# Altium PCB robot-basketball-basket-counter.PcbDoc
Units mm, origin at the board's own origin, x right, y up, seen from the top; angles counter-clockwise.
Board outline 50 x 66 mm, 4 copper layers (Top Layer, GND1, GND2, Bottom Layer), stack 1.588 mm thick; 19 components, 15 nets, 70 pads, 101 vias.
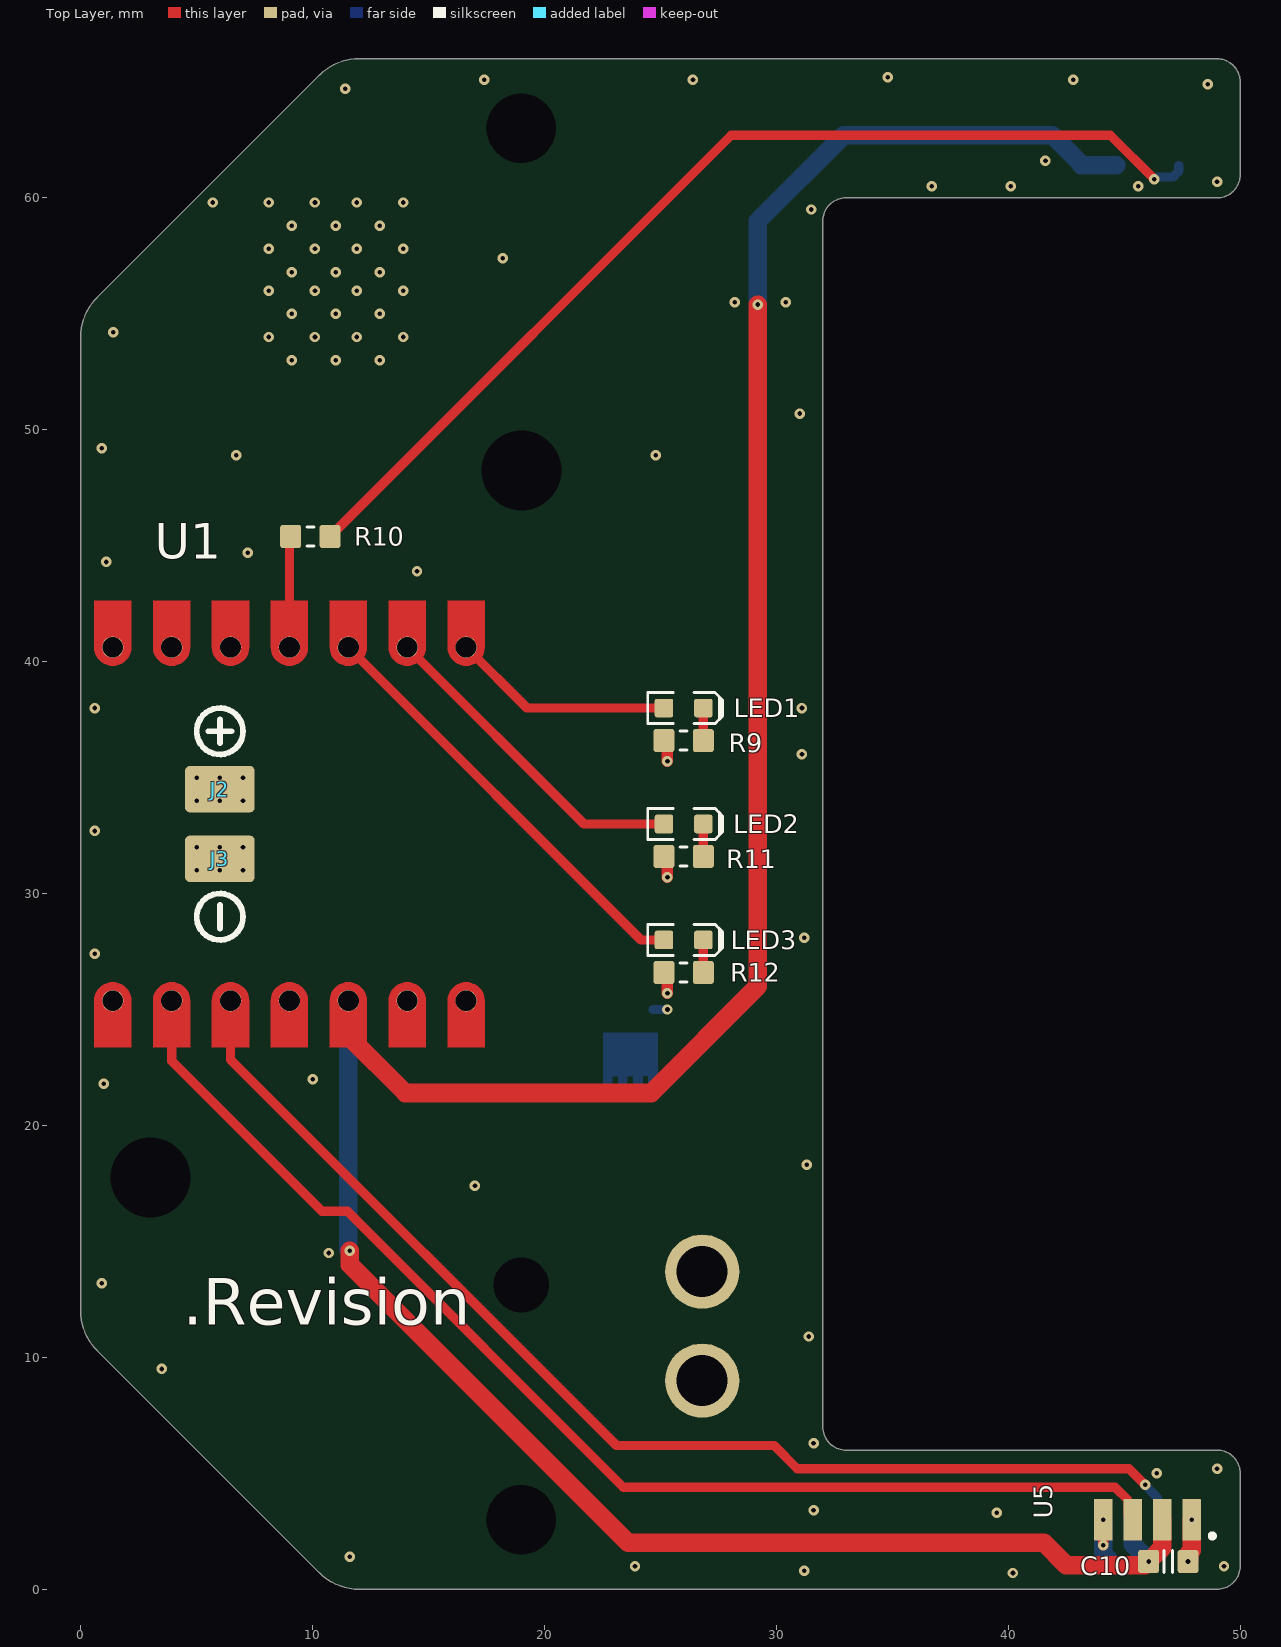
[diagram p0: Top Layer view]
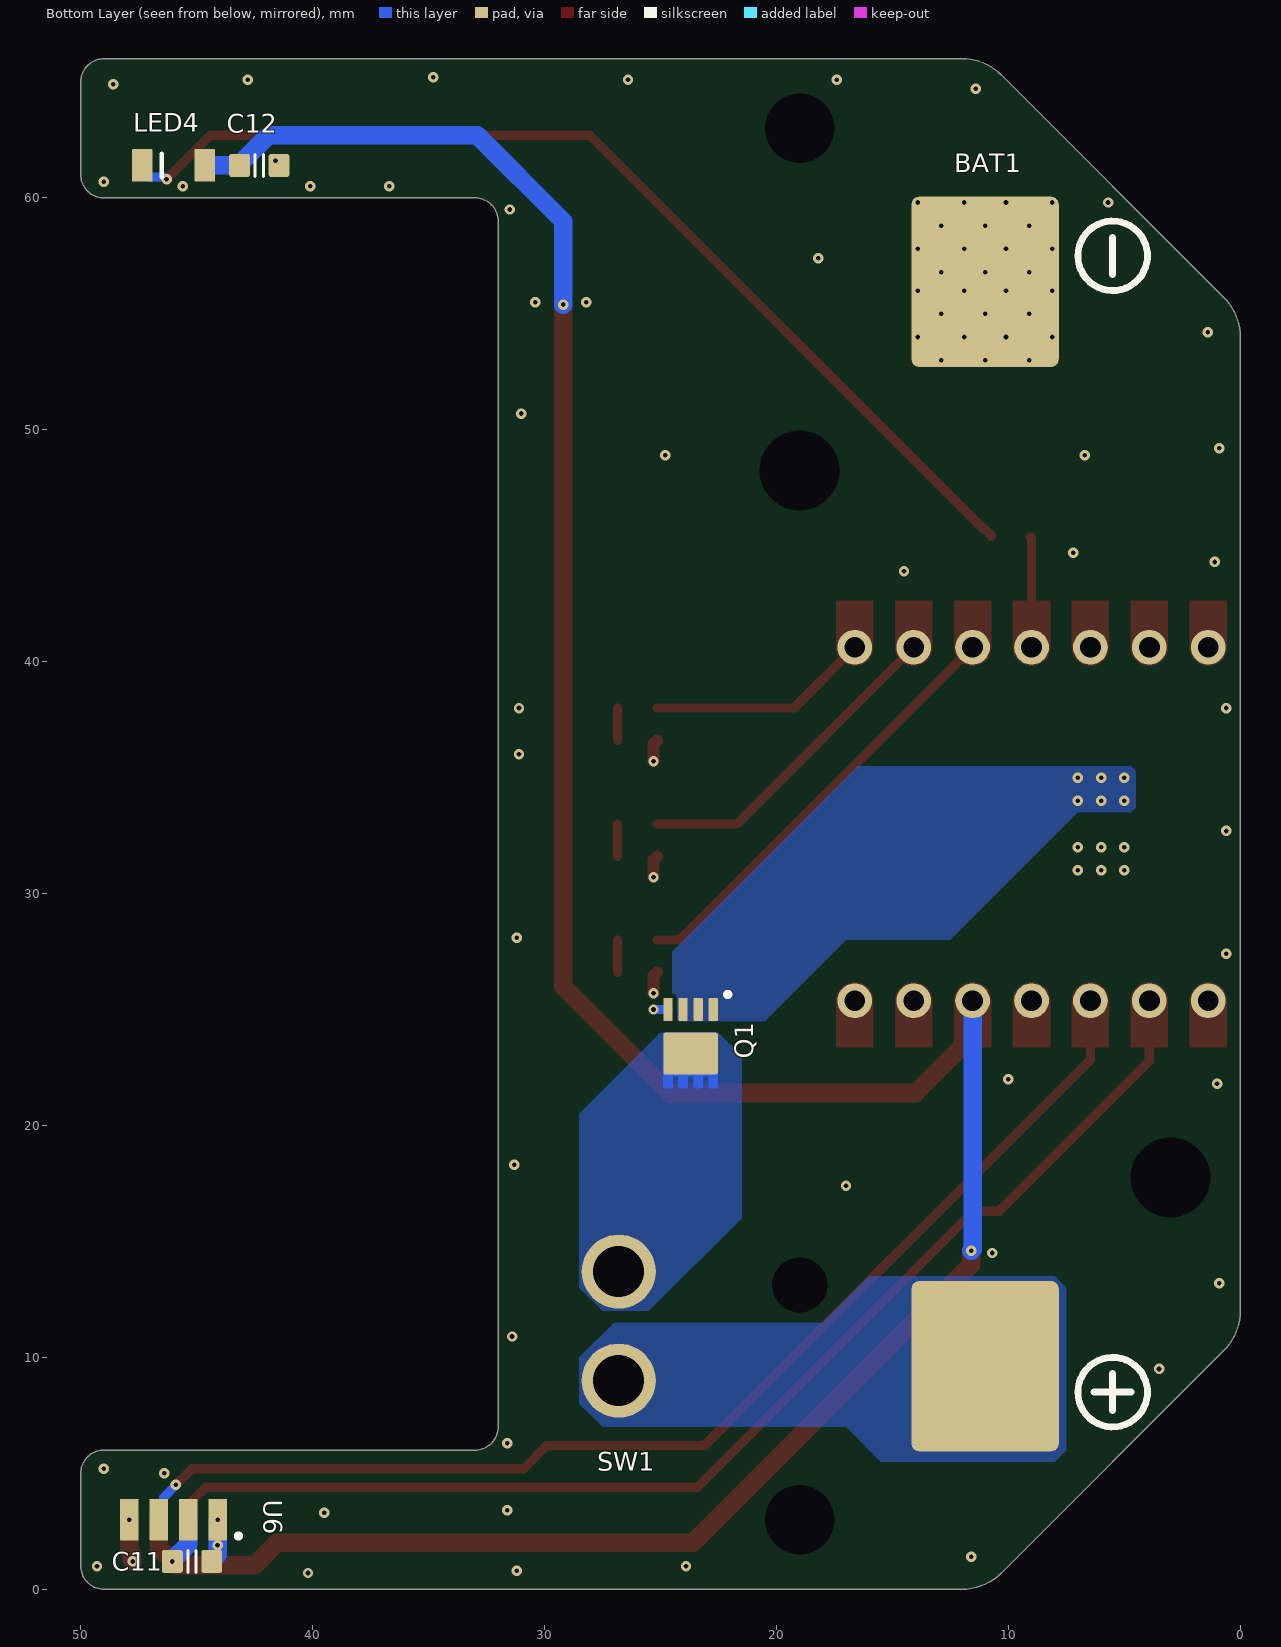
[diagram p1: Bottom Layer view, seen from below]
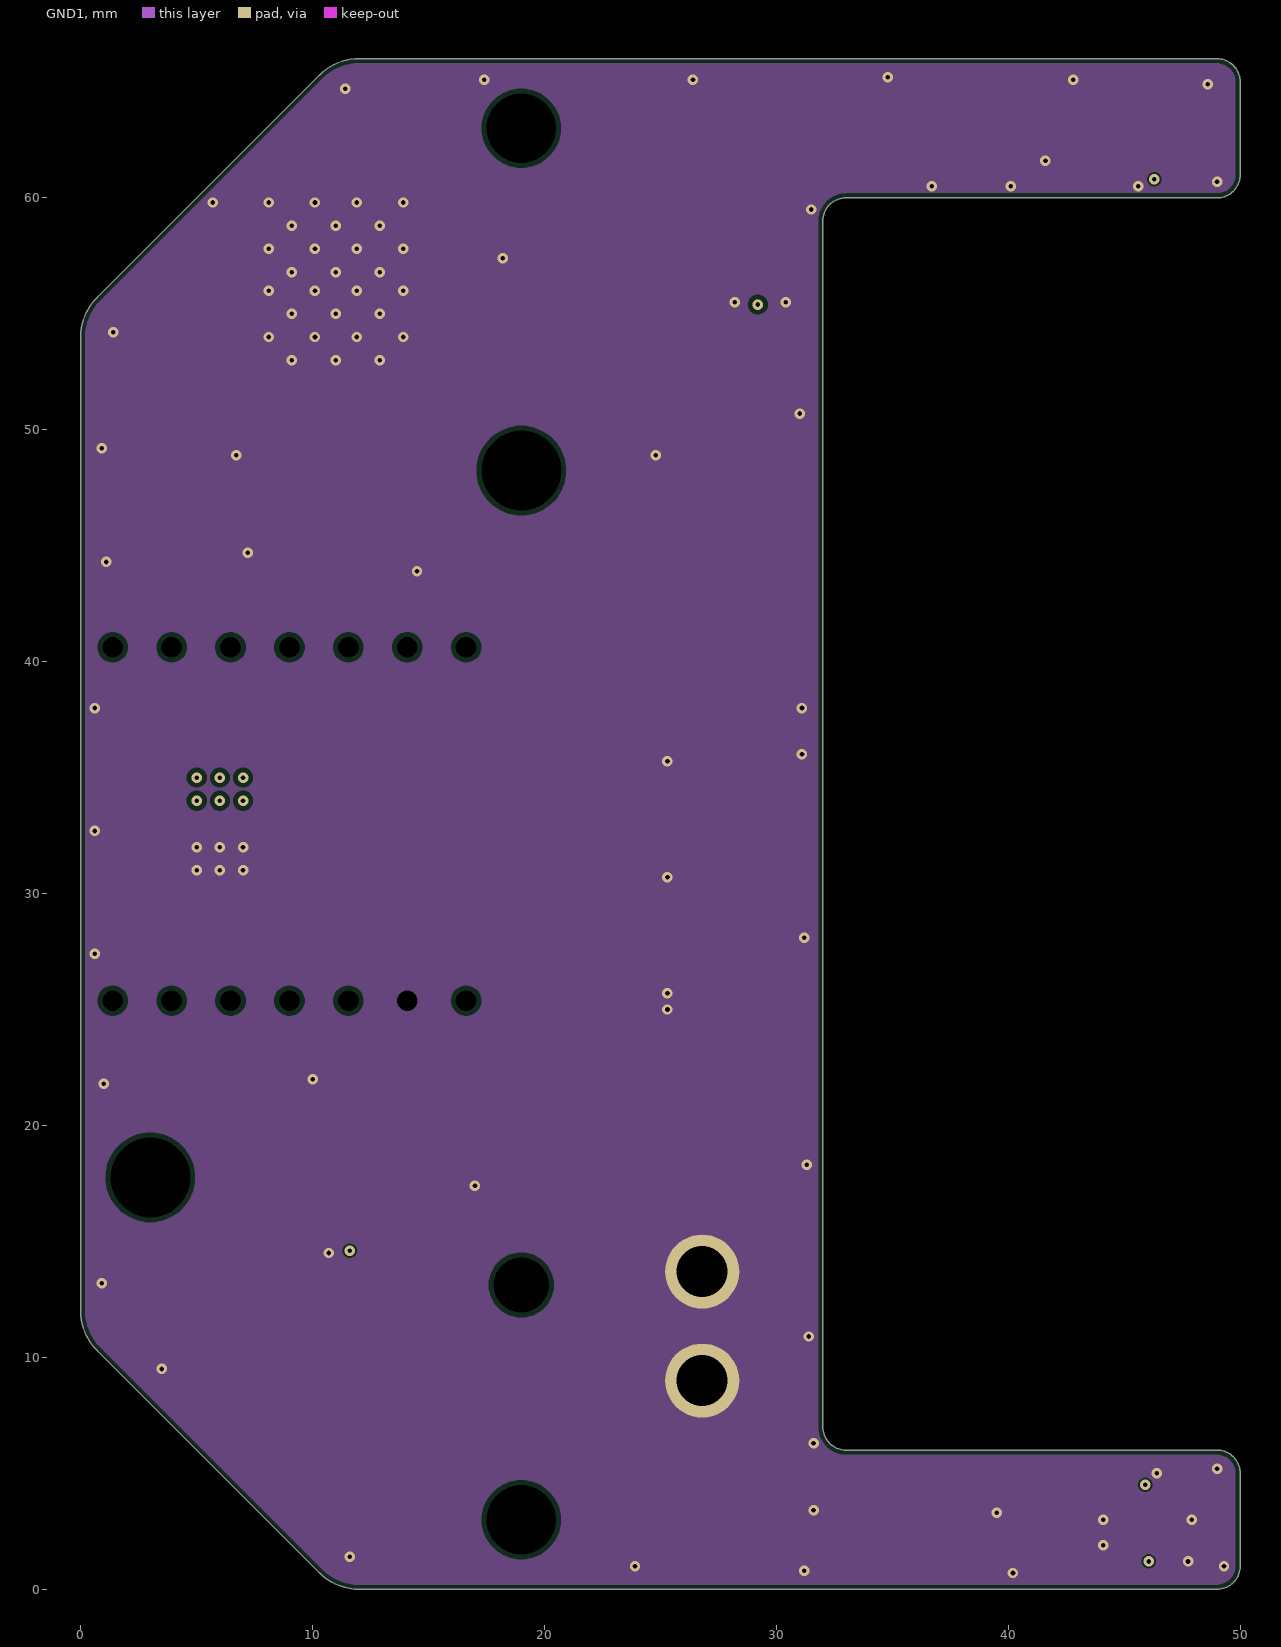
[diagram p2: GND1]
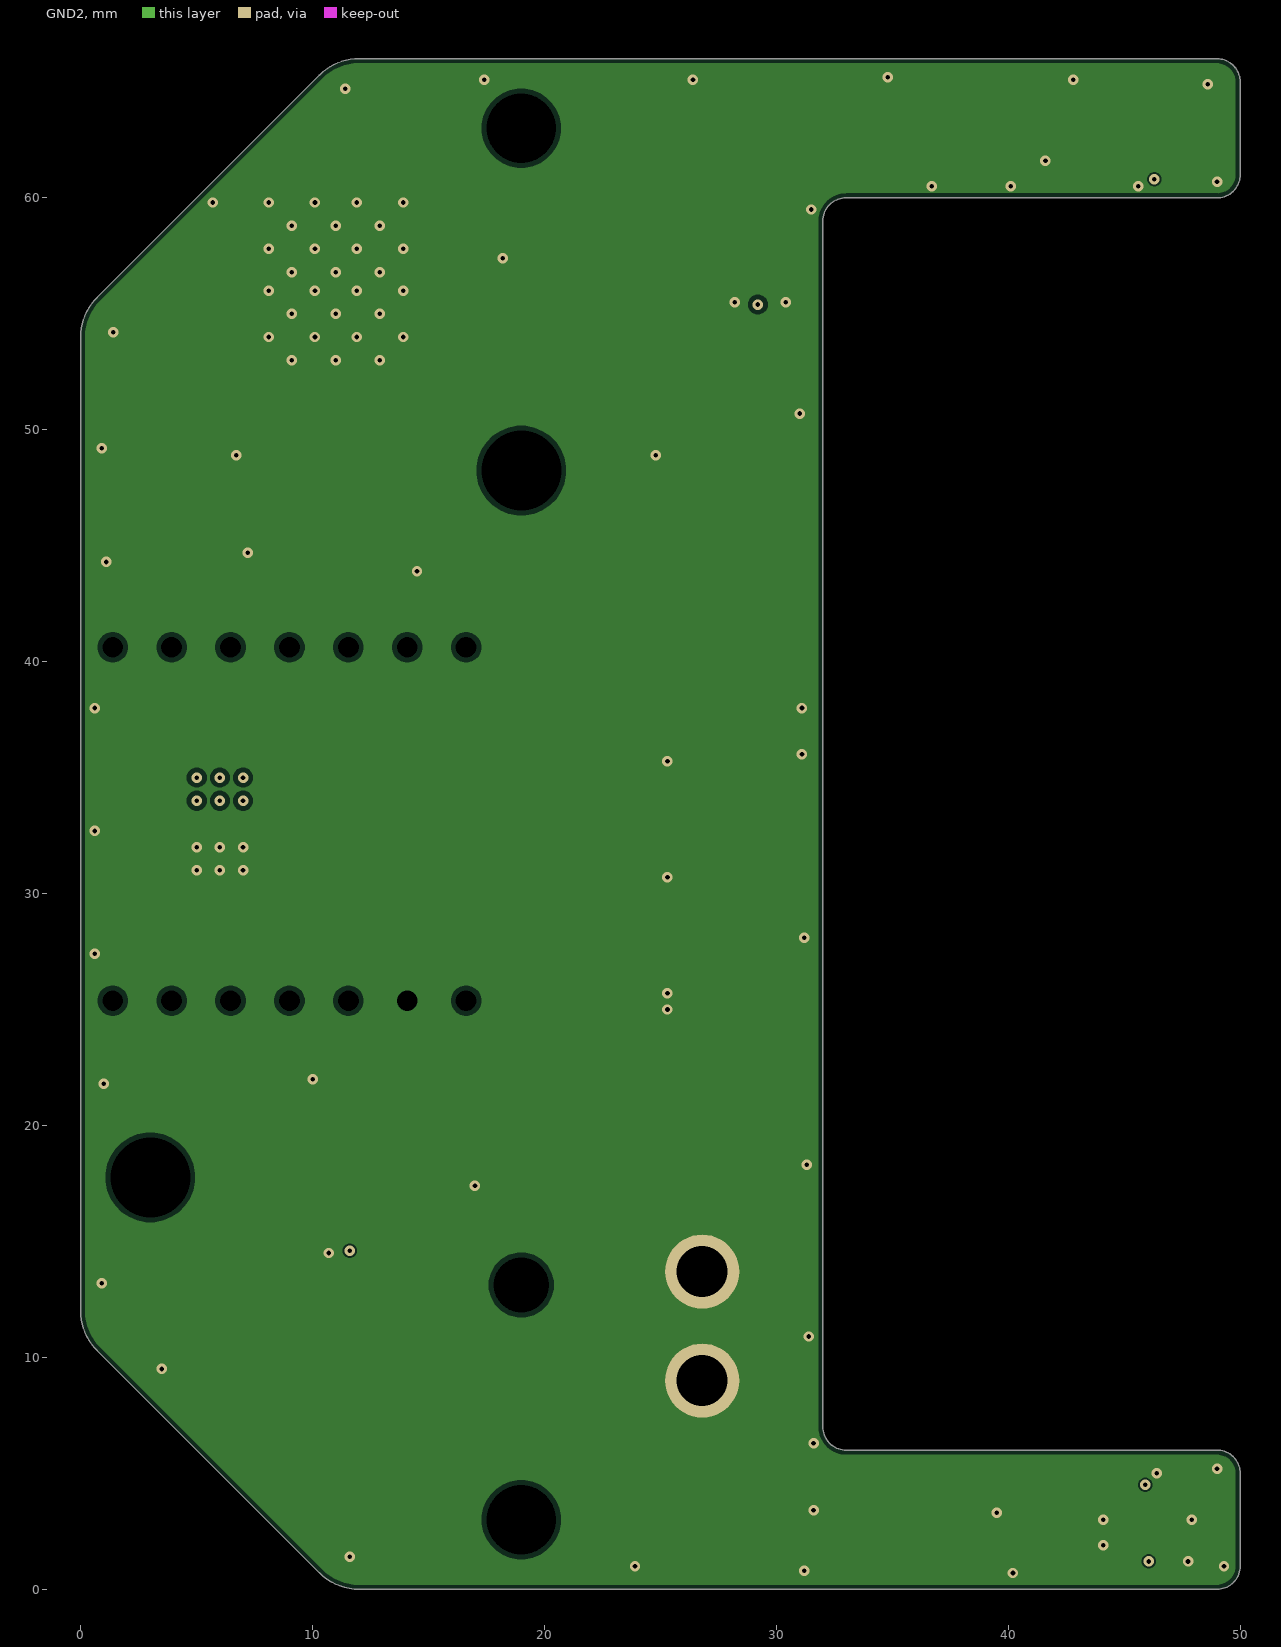
[diagram p3: GND2]
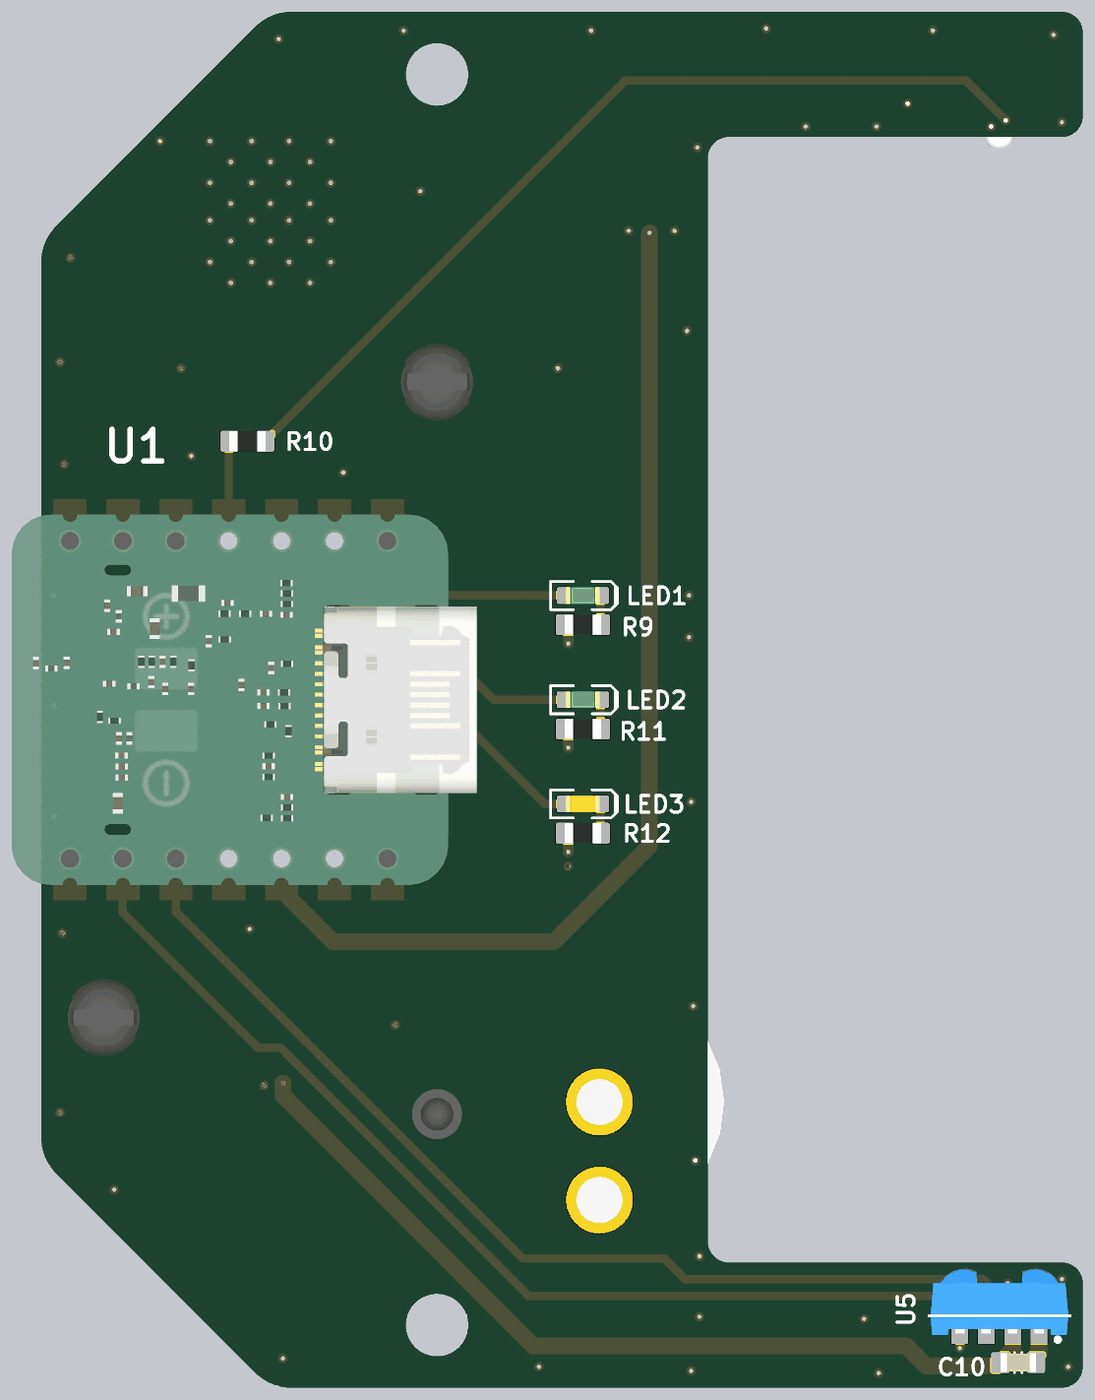
[diagram p4: 3D render of the assembled board from above, using the file's embedded part models]
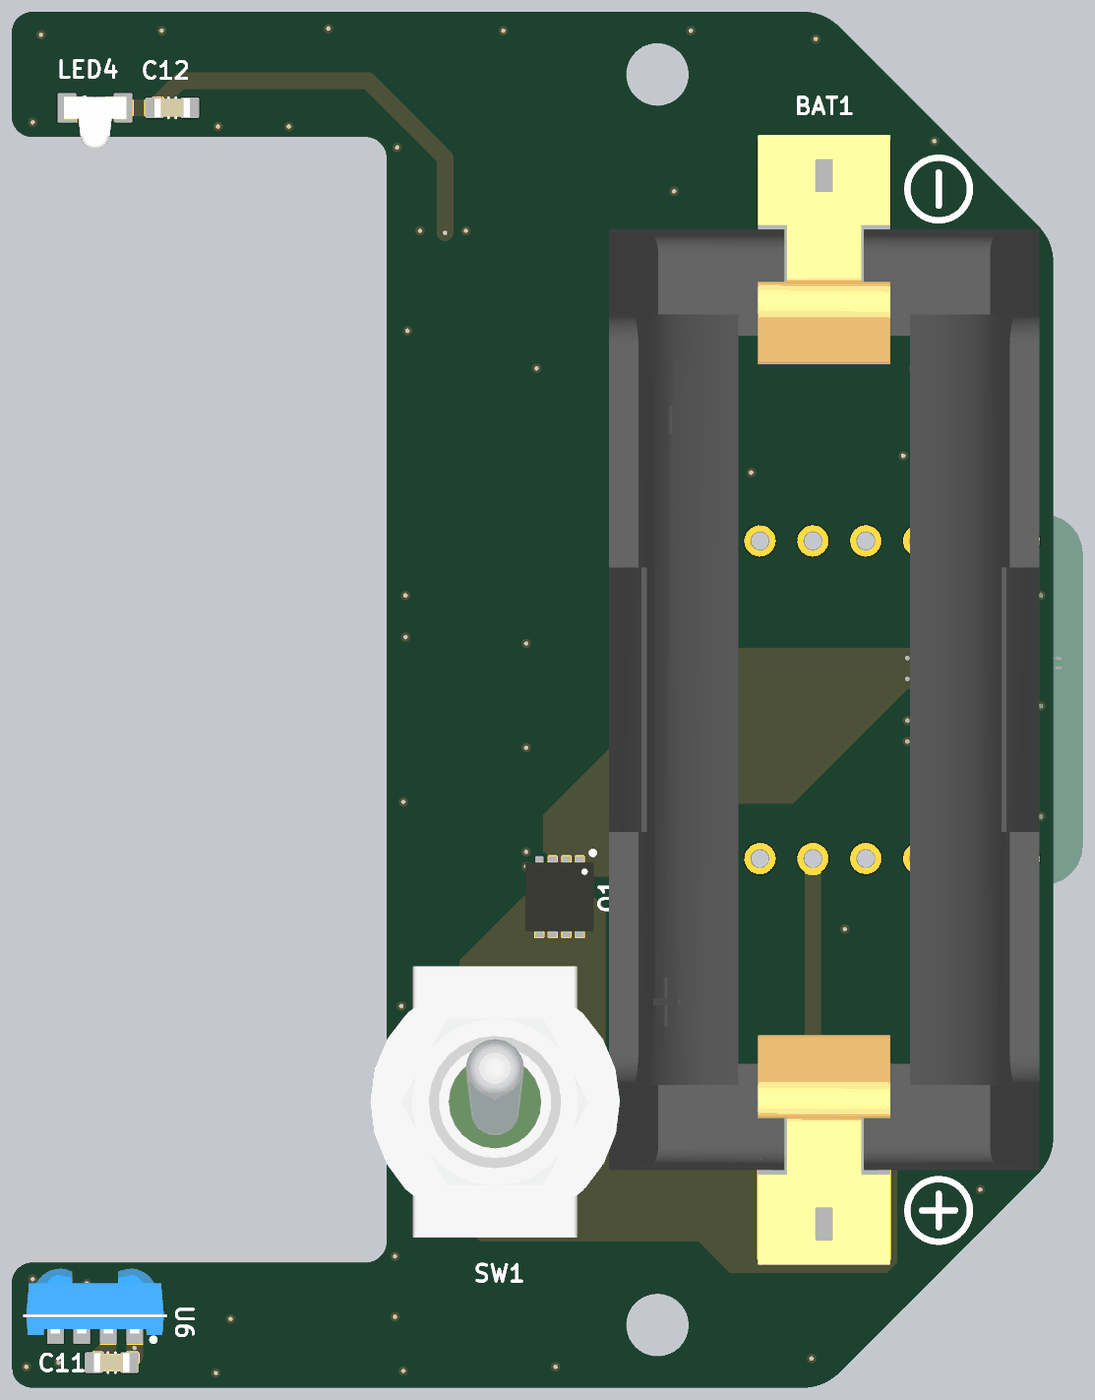
[diagram p5: 3D render of the assembled board from below, using the file's embedded part models]

## Layer stack, top to bottom
Top Solder: solder mask 0.0102, Solder Resist, Dk 3.5
Top Layer: signal copper 0.035
Dielectric 2: prepreg 0.2083, PP-022, Dk 4.5
GND1: signal copper 0.018
Dielectric 1: core 1.065, Core-042, Dk 4.6
GND2: signal copper 0.018
Dielectric 3: prepreg 0.2083, PP-022, Dk 4.5
Bottom Layer: signal copper 0.035
Bottom Solder: solder mask 0.0102, Solder Resist, Dk 3.5

## Board outline
12,0 49,0 ccw(c49,1) 50,1 50,5 ccw(c49,5) 49,6 33,6 cw(c33,7) 32,7 32,59 cw(c33,59) 33,60 49,60 ccw(c49,61) 50,61 50,65 ccw(c49,65) 49,66 12,66 ccw(c12,63.587) 10.293,65.293 0.707,55.707 ccw(c2.413,54.001) 0,54.001 0,12 ccw(c2.414,12) 0.707,10.293 10.293,0.707 ccw(c12,2.414)

## Design rules (kind name [scope] priority, off if disabled: settings)
BoardOutlineClearance [All] p1: gap=0.2 ignorepadtopadclearanceinfootprint=FALSE except(0: Arc-SplitContinuation Track-SplitContinuation SMDPad-SplitContinuation THPad-SplitContinuation Via-SplitContinuation Fill-SplitContinuation Poly-SplitContinuation Region-SplitContinuation Text-SplitContinuation)
Clearance [All] p1: gap=0.2 ignorepadtopadclearanceinfootprint=TRUE
ComponentClearance ComponentClearanceIgnore [Id = 'jd_power_my2813c' vs Id = 'M2x5_torx'] p1: gap=0 collisioncheckmode=3 verticalgap=0 showdistances=FALSE
ComponentClearance [not IsNetTieComponent vs not IsNetTieComponent] p2: gap=0.19 collisioncheckmode=3 verticalgap=0 showdistances=FALSE
DiffPairsRouting DiffPairsRoutingUSB [InDifferentialPairClass('USB')] p1: maxlimit=0.2 minlimit=0.2 mostfreqgap=0.2 toplayer_minwidth=0.26 toplayer_maxwidth=0.26 toplayer_prefwidth=0.26 midlayer1_minwidth=0.26 midlayer1_maxwidth=0.26 midlayer1_prefwidth=0.26 midlayer2_minwidth=0.26 midlayer2_maxwidth=0.26 midlayer2_prefwidth=0.26 bottomlayer_minwidth=0.26 bottomlayer_maxwidth=0.26 bottomlayer_prefwidth=0.26 maxuncoupledlength=12.7
DiffPairsRouting [All] p2: maxlimit=0.2 minlimit=0.2 mostfreqgap=0.2 toplayer_minwidth=0.2 toplayer_maxwidth=0.4 toplayer_prefwidth=0.3 midlayer1_minwidth=0.2 midlayer1_maxwidth=0.4 midlayer1_prefwidth=0.3 midlayer2_minwidth=0.2 midlayer2_maxwidth=0.4 midlayer2_prefwidth=0.3 bottomlayer_minwidth=0.2 bottomlayer_maxwidth=0.4 bottomlayer_prefwidth=0.3 maxuncoupledlength=10
HoleSize [All] p1: absolutevalues=TRUE maxlimit=5 minlimit=0.2 maxpercent=80.000 minpercent=20.000
HoleToHoleClearance [All] p1: gap=0.5 allowstackedmicrovias=FALSE
MinimumSolderMaskSliver [All] p1: minsoldermaskwidth=0.1
PlaneClearance [All] p1: clearance=0.2
PlaneConnect [All] p1: planeconnectstyle=Direct reliefexpansion=0.5 reliefentries=4 reliefconductorwidth=0.3 reliefairgap=0.2
PolygonConnect [All] p1: connectstyle=Direct reliefconductorwidth=0.3 reliefentries=4 polygonreliefangle="90 Angle" airgapwidth=0.2
RoutingVias [All] p1: holewidth=0.2 width=0.45 viastyle="Through Hole" minholewidth=0.2 minwidth=0.45 maxholewidth=3 maxwidth=5
SilkToSilkClearance [All] p1: silktosilkclearance=0.2
SilkToSolderMaskClearance [IsPad] p1: minsilkscreentomaskgap=0.1 clearancetoexposedcopper=TRUE
SolderMaskExpansion SolderMaskExpansionVia [IsVia] p1: expansion=0 istentingtop=TRUE useseparateexpansions=TRUE expansionbottom=0 istentingbottom=TRUE
SolderMaskExpansion [All] p2: expansion=0.05 istentingtop=FALSE
SupplyNets "Schematic Supply Nets_5" [InNet('GND')] p1: voltage=0.000
SupplyNets "Schematic Supply Nets_4" [InNet('+3.3')] p2: voltage=0.000
SupplyNets "Schematic Supply Nets_1" [InNet('BAT_VIN')] p3: voltage=0.000
SupplyNets "Schematic Supply Nets" [InNet('BAT+')] p4: voltage=0.000
Width [All] p1: maxlimit=5 minlimit=0.2 preferedwidth=0.2
21 further rules are at their usual default settings.

## Components (designator, comment, footprint, x,y, rotation, side; value= is the part's Value field where it differs from the comment)
BAT1 "Keystone 1096" Keystone_PN1096 11,33 r270 bottom locked
C10 "approved sub OK" CAPC1608X90N 46.9,1.2 r0 top value=1µ
C11 "approved sub OK" CAPC1608X90N 45.2,1.2 r180 bottom value=1µ
C12 "approved sub OK" CAPC1608X90N 42.3,61.4 r180 bottom value=1µ
J2 "PAD" PAD_3.0x2.0 6,34.5 r180 top
J3 "PAD" PAD_3.0x2.0 6,31.5 r180 top
LED1 "Blue" LED-0603-GREEN 26,38 r0 top
LED2 "Green" LED-0603-GREEN 26,33 r0 top
LED3 "Orange" LED-0603-YELLOW 26,28 r0 top
LED4 "VSMY14940" VSMY14940 46,61.4 r180 bottom
Q1 "SiSS63DN" Vishay_PowerPAK_1212-8S 23.7,23.55 r0 bottom
R9 "Thick Film" RESC1608X55N 26,36.6 r0 top value=470R
R10 "Thick Film" RESC1608X55N 9.9,45.4 r0 top value=10K
R11 "Thick Film" RESC1608X55N 26,31.6 r0 top value=330R
R12 "Thick Film" RESC1608X55N 26,26.6 r0 top value=470R
SW1 "M2011S3A1W01" M2011S3A1W01 26.8,9 r270 bottom
U1 "XIAO ESP32C6" XIAO_ESP32_C6 9,33 r270 top
U5 "TSSP95056" VISHAY_HEIMDALL_VERTICAL 46,3 r180 top
U6 "TSSP95056" VISHAY_HEIMDALL_VERTICAL 46,3 r0 bottom

## Footprints (in the part's own frame and the unit in brackets; to place one, negate y for a bottom-side part, rotate by r counter-clockwise, add the part's x,y. Pads: shape width x height; smd on the part's side, far side on the other; paste and mask are expansions set on the pad)
CAPC1608X90N [mm] "Chip Capacitor, Body 1.6x0.8mm, EIA 0603, IPC Medium Density"
  round 0.254 on Mech15: 0(0,0)
  rrect25% 0.9x1 smd: 1(-0.85,0) 2(0.85,0)
  silkscreen extent -0.18,-0.48 0.18,0.48, body extent -0.85,-0.45 0.85,0.45, height 0.89
Keystone_PN1096 [mm]
  round 0 hole 3.45 unplated: MH1(-15.24,-8) MH2(15.24,8)
  round 0 hole 2.39 unplated: MH3(19.88,-8)
  rrect10% 7.34x6.35 smd: minus(-23.38,0) plus(23.38,0)
  body extent -27.1,-10.33 27.1,10.33, height 15.11
LED-0603-GREEN [mm]
  round 0.254 on Mech15: 0(0,0)
  rrect25% 0.8x0.8 smd: A(-0.85,0) K(0.85,0)
  Top Layer pour cut-out: -0.5,0.5 0.5,0.5 0.5,-0.5 -0.5,-0.5
  silkscreen extent -1.55,-0.67 1.68,0.67, body extent -0.8,-0.4 0.8,0.4, height 0.75
LED-0603-YELLOW [mm]
  round 0.254 on Mech15: 0(0,0)
  rrect25% 0.8x0.8 smd: A(-0.85,0) K(0.85,0)
  Top Layer pour cut-out: -0.5,0.5 0.5,0.5 0.5,-0.5 -0.5,-0.5
  silkscreen extent -1.55,-0.67 1.68,0.67, body extent -0.8,-0.4 0.8,0.4, height 0.75
M2011S3A1W01 [mm]
  round 3.2 hole 2.2: 1(-4.7,0) 2(0,0)
  body extent -11.2,-5.99 1.8,5.99, height 24.89
PAD_3.0x2.0 [mm]
  rrect20% 3x2 smd: 1(0,0)
RESC1608X55N [mm] "Chip Resistor, Body 1.6x0.8mm, EIA 0603, IPC Medium Density"
  round 0.254 on Mech15: 0(0,0)
  rrect25% 0.9x1 smd: 1(-0.85,0) 2(0.85,0)
  silkscreen extent -0.15,-0.41 0.15,0.41, body extent -0.87,-0.47 0.88,0.48, height 0.54
VISHAY_HEIMDALL_VERTICAL [mm]
  rrect10% 0.8x1.8 smd: 1(-1.905,0) 2(-0.635,0) 3(0.635,0) 4(1.905,0)
  silkscreen extent -2.9,0.6 -2.7,0.8, body extent -3.45,-2.71 3.45,0.49, height 3.1
Vishay_PowerPAK_1212-8S [mm]
  rrect10% 2.35x1.8 smd paste-2539.97 mask+0: D(0,0.45)
  rrect25% 0.4x1 smd: G(0.975,-1.45) S(-0.975,-1.45) S(-0.325,-1.45) S(0.325,-1.45)
  Top Layer region: -1.175,1.9 -1.175,-0.4 -1.171,-0.419 -1.16,-0.435 -1.144,-0.446 -1.125,-0.45 -1.125,-0.45 1.125,-0.45 1.144,-0.446 1.16,-0.435 1.171,-0.419 1.175,-0.4 1.175,-0.4 1.175,1.9 1.171,1.919 1.16,1.935 1.144,1.946 1.125,1.95 1.125,1.95 0.825,1.95 0.806,1.946 0.79,1.935 0.779,1.919 0.775,1.9 0.775,1.9 0.775,1.475 0.771,1.455 0.76,1.438 0.743,1.426 0.722,1.422 0.722,1.422 0.578,1.422 0.557,1.426 0.54,1.438 0.529,1.455 0.525,1.475 0.525,1.475 0.525,1.9 0.521,1.919 0.51,1.935 0.494,1.946 0.475,1.95 0.475,1.95 0.175,1.95 0.156,1.946 0.14,1.935 0.129,1.919 0.125,1.9 0.125,1.9 0.125,1.475 0.121,1.455 0.11,1.438 0.093,1.426 0.072,1.422 0.072,1.422 -0.072,1.422 -0.093,1.426 -0.11,1.438 -0.121,1.455 -0.125,1.475 -0.125,1.475 -0.125,1.9 -0.129,1.919 -0.14,1.935 -0.156,1.946 -0.175,1.95 -0.175,1.95 -0.475,1.95 -0.494,1.946 -0.51,1.935 -0.521,1.919 -0.525,1.9 -0.525,1.9 -0.525,1.475 -0.529,1.455 -0.54,1.438 -0.557,1.426 -0.578,1.422 -0.578,1.422 -0.722,1.422 -0.749,1.43 -0.768,1.449 -0.775,1.475 -0.775,1.475 -0.775,1.9 -0.779,1.919 -0.79,1.935 -0.806,1.946 -0.825,1.95 -0.825,1.95 -1.125,1.95 -1.144,1.946 -1.16,1.935 -1.171,1.919 -1.175,1.9
  silkscreen extent -1.7,-2.2 -1.5,-2, body extent -1.65,-1.66 1.65,1.66, height 0.8
VSMY14940 [mm]
  rrect10% 0.9x1.4 smd: A(1.35,0) K(-1.35,0)
  silkscreen extent -0.5,-0.5 -0.5,0.5, body extent -1.5,-1.99 1.5,0.55, height 1.2
XIAO_ESP32_C6 [mm]
  round 0.925 / inner round 0 / far side round 1.5 hole 0.9: 1(-7.62,7.62) 2(-7.62,5.08) 3(-7.62,2.54) 4(-7.62,0) 5(-7.62,-2.54) 6(-7.62,-5.08) 7(-7.62,-7.62) 8(7.62,-7.62) 9(7.62,-5.08) 10(7.62,-2.54) 11(7.62,0) 12(7.62,2.54) 13(7.62,5.08) 14(7.62,7.62)
  Top Layer region: 7.62,8.42 9.62,8.42 9.62,6.82 7.62,6.82 7.314,6.881 7.054,7.054 6.881,7.314 6.82,7.62 6.82,7.62 6.881,7.926 7.054,8.186 7.314,8.359 7.62,8.42
  Top Layer region: 7.62,5.88 9.62,5.88 9.62,4.28 7.62,4.28 7.314,4.341 7.054,4.514 6.881,4.774 6.82,5.08 6.82,5.08 6.881,5.386 7.054,5.646 7.314,5.819 7.62,5.88
  Top Layer region: 7.62,3.34 9.62,3.34 9.62,1.74 7.62,1.74 7.314,1.801 7.054,1.974 6.881,2.234 6.82,2.54 6.82,2.54 6.881,2.846 7.054,3.106 7.314,3.279 7.62,3.34
  Top Layer region: 7.62,0.8 9.62,0.8 9.62,-0.8 7.62,-0.8 7.314,-0.739 7.054,-0.566 6.881,-0.306 6.82,0 6.82,0 6.881,0.306 7.054,0.566 7.314,0.739 7.62,0.8
  Top Layer region: 7.62,-1.74 9.62,-1.74 9.62,-3.34 7.62,-3.34 7.314,-3.279 7.054,-3.106 6.881,-2.846 6.82,-2.54 6.82,-2.54 6.881,-2.234 7.054,-1.974 7.314,-1.801 7.62,-1.74
  Top Layer region: 7.62,-4.28 9.62,-4.28 9.62,-5.88 7.62,-5.88 7.314,-5.819 7.054,-5.646 6.881,-5.386 6.82,-5.08 6.82,-5.08 6.881,-4.774 7.054,-4.514 7.314,-4.341 7.62,-4.28
  Top Layer region: 7.62,-6.82 9.62,-6.82 9.62,-8.42 7.62,-8.42 7.314,-8.359 7.054,-8.186 6.881,-7.926 6.82,-7.62 6.82,-7.62 6.881,-7.314 7.054,-7.054 7.314,-6.881 7.62,-6.82
  Top Layer region: -7.62,-8.42 -9.62,-8.42 -9.62,-6.82 -7.62,-6.82 -7.314,-6.881 -7.054,-7.054 -6.881,-7.314 -6.82,-7.62 -6.82,-7.62 -6.881,-7.926 -7.054,-8.186 -7.314,-8.359 -7.62,-8.42
  Top Layer region: -7.62,-5.88 -9.62,-5.88 -9.62,-4.28 -7.62,-4.28 -7.314,-4.341 -7.054,-4.514 -6.881,-4.774 -6.82,-5.08 -6.82,-5.08 -6.881,-5.386 -7.054,-5.646 -7.314,-5.819 -7.62,-5.88
  Top Layer region: -7.62,-3.34 -9.62,-3.34 -9.62,-1.74 -7.62,-1.74 -7.314,-1.801 -7.054,-1.974 -6.881,-2.234 -6.82,-2.54 -6.82,-2.54 -6.881,-2.846 -7.054,-3.106 -7.314,-3.279 -7.62,-3.34
  Top Layer region: -7.62,-0.8 -9.62,-0.8 -9.62,0.8 -7.62,0.8 -7.314,0.739 -7.054,0.566 -6.881,0.306 -6.82,0 -6.82,0 -6.881,-0.306 -7.054,-0.566 -7.314,-0.739 -7.62,-0.8
  Top Layer region: -7.62,1.74 -9.62,1.74 -9.62,3.34 -7.62,3.34 -7.314,3.279 -7.054,3.106 -6.881,2.846 -6.82,2.54 -6.82,2.54 -6.881,2.234 -7.054,1.974 -7.314,1.801 -7.62,1.74
  Top Layer region: -7.62,4.28 -9.62,4.28 -9.62,5.88 -7.62,5.88 -7.314,5.819 -7.054,5.646 -6.881,5.386 -6.82,5.08 -6.82,5.08 -6.881,4.774 -7.054,4.514 -7.314,4.341 -7.62,4.28
  Top Layer region: -7.62,6.82 -9.62,6.82 -9.62,8.42 -7.62,8.42 -7.314,8.359 -7.054,8.186 -6.881,7.926 -6.82,7.62 -6.82,7.62 -6.881,7.314 -7.054,7.054 -7.314,6.881 -7.62,6.82
  body extent -8.89,-10.42 8.89,11.91, height 9.96

## Part data
BAT1: library part Keystone_1096
C10 C11 C12: library part CAPC_1u_0603_X7R_16V_10%, "Capacitor SMD Cer 1uF 10% 16V X7R 0603", Manufacturer 1="TDK Corporation", Manufacturer Part Number 1=C1608X7R1C105K, Package / Case="0603 (1608 metric)", Ratings="16V; X7R", Supplier Part Number 1=445-1604-1-ND, Tolerance=±10%, ComponentLink1Description=http://product.tdk.com/capacitor/mlcc/en/documents/mlcc_commercial_general_en.pdf, ComponentLink1URL=http://product.tdk.com/capacitor/mlcc/en/documents/mlcc_commercial_general_en.pdf, Material=ceramic, SCDType=spec, Supplier 1=Digi-Key
LED1: library part LED_SMD_Green_0603_570nm, "LED 0603 SMD Green 570nm 50mcd 20mA", Color=Green, Current - Test=20mA, Manufacturer 1="Kingbright Company LLC", Manufacturer Part Number 1=APT1608CGCK, Package / Case="0603 (1608 metric)", Ratings="20mcd min; 50 mcd typ; 570 nm", Supplier Part Number 1=754-1116-1-ND, Voltage - Forward (Vf) @ 10mA=2.0V, Voltage - Forward (Vf) Typ=2.1V, ComponentLink1Description=http://www.us.kingbright.com/images/catalog/SPEC/APT1608CGCK.pdf, ComponentLink1URL=http://www.us.kingbright.com/images/catalog/SPEC/APT1608CGCK.pdf, Lens Style/Size="Rectangle with Flat Top, 1.1mm x 0.8mm", Lens Type=Clear, Material=AlGaInP, RoHS 1="RoHS Compliant", SCDType=source, Supplier 1=Digi-Key, Viewing Angle=120°, Wavelength - Dominant=570nm, Wavelength - Peak=574nm
LED2: library part LED_SMD_Green_0603_570nm, "LED 0603 SMD Green 570nm 50mcd 20mA", Current - Test=20mA, Manufacturer 1="Kingbright Company LLC", Manufacturer Part Number 1=APT1608CGCK, Package / Case="0603 (1608 metric)", Ratings="20mcd min; 50 mcd typ; 570 nm", Supplier Part Number 1=754-1116-1-ND, Voltage - Forward (Vf) @ 10mA=2.0V, Voltage - Forward (Vf) Typ=2.1V, Color=Green, ComponentLink1Description=http://www.us.kingbright.com/images/catalog/SPEC/APT1608CGCK.pdf, ComponentLink1URL=http://www.us.kingbright.com/images/catalog/SPEC/APT1608CGCK.pdf, Lens Style/Size="Rectangle with Flat Top, 1.1mm x 0.8mm", Lens Type=Clear, Material=AlGaInP, RoHS 1="RoHS Compliant", SCDType=source, Supplier 1=Digi-Key, Viewing Angle=120°, Wavelength - Dominant=570nm, Wavelength - Peak=574nm
LED3: library part LED_SMD_Yellow_0603_150mcd, "LED 0603 SMD Yellow 590nm 150mcd 20mA", Manufacturer 1="Kingbright Company LLC", Manufacturer Part Number 1=APT1608SYCK, Package / Case="0603 (1608 metric)", Ratings="150 mcd; 590 nm", Supplier Part Number 1=754-1124-1-ND, Voltage - Forward (Vf) @ 10mA=1.95V, Voltage - Forward (Vf) Typ=2V, ComponentLink1Description=http://www.us.kingbright.com/images/catalog/SPEC/APT1608SYCK.pdf, ComponentLink1URL=http://www.us.kingbright.com/images/catalog/SPEC/APT1608SYCK.pdf, Material="AlGaInP on GaAs", SCDType=source, Supplier 1=Digi-Key
R9 R12: library part RES_470R_0603_5%, "Resistor SMD chip 470 Ohm 0.1W 5% 0603", Manufacturer 1=Vishay/Dale, Manufacturer Part Number 1=CRCW0603470RJNEA, Package / Case="0603 (1608 metric)", Ratings="1/10 W", Supplier Part Number 1=541-470GCT-ND, Tolerance=±5%, Material="Thick Film", SCDType=spec, Supplier 1=Digi-Key
R10: library part RES_10K_0603_1%, "Resistor SMD chip 10k Ohm 0.1W 1% 0603", Manufacturer 1=Yageo, Manufacturer Part Number 1=RC0603FR-0710KL, Package / Case="0603 (1608 Metric)", Ratings=1/10W, Supplier Part Number 1=311-10.0KHRCT-ND, Tolerance=±1%, SCDType=spec, Supplier 1=Digi-Key
R11: library part RES_330R_0603_5%, "Resistor SMD chip 330 Ohm 0.1W 5% 0603", Manufacturer 1="Vishay Dale", Manufacturer 2=Yageo, Manufacturer Part Number 1=CRCW0603330RJNEA, Manufacturer Part Number 2=RC0603JR-07330RL, Package / Case="0603 (1608 metric)", Ratings="1/10 W", Supplier Part Number 1=541-330GCT-ND, Tolerance=±5%, ComponentLink1Description=http://www.vishay.com/doc?20035, ComponentLink1URL=http://www.vishay.com/doc?20035, ComponentLink2Description=http://www.yageo.com/documents/recent/PYu-RC0603_51_RoHS_L_4.pdf, ComponentLink2URL=http://www.yageo.com/documents/recent/PYu-RC0603_51_RoHS_L_4.pdf, Material="Thick Film", SCDType=spec, Supplier 1=Digi-Key, Supplier 2=Digi-Key, Supplier Part Number 2=311-330GRCT-ND
U1: library part XIAO_ESP32_C6

## Free pads (board coordinates)
  round 0 hole 3 unplated: 1(19,3) 2(19,63)

## Via types
v1: diameter 0.45, hole 0.2, Top Layer to Bottom Layer, tented both sides, 101 vias

## Nets (pads, with @x,y where several pads share a name; then routed paths per layer and width w, separated by ;. In a path a pad name is that pad's centre, name@x,y a point inside that pad or via, vN(x,y) a via of type N, cw(c..) or ccw(c..) an arc to the next point about the centre after c; other vN are vias at no path point)
+3.3: C10.1 C11.1 C12.1 LED4.A U1.12 U5.2 U6.2 | length 127.9
  Top Layer w0.8: U1.12 11.54,23.86 14,21.4 24.6,21.4 29.2,26 v1(29.2,55.4) ; v1(11.6,14.6) 11.6,14 23.6,2 41.538,2 42.5,1.038 45.888,1.038 45.95,1.1 46,1.1 46.05,1.15 v1(46.05,1.2) 46.05,1.25 46.1,1.3 46.15,1.3 46.635,1.785 U5.2
  Bottom Layer w0.8: U1.12 11.54,14.66 v1(11.6,14.6) ; v1(29.2,55.4) 29.2,59 32.9,62.7 41.9,62.7 C12.1@43,61.6 ; C12.1 LED4.A ; U6.2 45.365,1.935 46.05,1.25 v1(46.05,1.2)
BAT+: BAT1.plus SW1.2
BAT_VIN: J2.1 Q1.S
  other v1: 5,34 6,34 7,34 5,35 6,35 7,35
GND: BAT1.minus C10.2 C11.2 C12.2 J3.1 Q1.G R9.1 R11.1 R12.1 U1.13 U5.1 U5.4 U6.1 U6.4 | length 8.4
  Top Layer w0.45: v1(44.095,3) 44.1,2.995 v1(44.1,1.9)
  Top Layer w0.5: R12.1 25.3,26.45 v1(25.3,25.7) ; R11.1 25.3,31.45 v1(25.3,30.7) ; R9.1 25.3,36.45 v1(25.3,35.7)
  Top Layer w0.8: v1(47.75,1.2) 47.8,1.25 47.8,1.568 47.905,1.673 v1(47.905,3)
  Bottom Layer w0.4: Q1.G v1(25.3,25)
  Bottom Layer w0.8: v1(44.095,3) 44.095,1.505 44.35,1.25 C11.2
  other v1: 40.2,0.7 31.2,0.8 23.9,1 49.3,1 11.6,1.4 39.5,3.3 31.6,3.4 46.4,5 49,5.2 31.6,6.3 3.5,9.5 31.4,10.9 0.9,13.2 10.7,14.5 17,17.4 31.3,18.3 1,21.8 10,22 0.6,27.4 31.2,28.1 5,31 6,31 7,31 5,32 6,32 7,32 0.6,32.7 31.1,36 0.6,38 31.1,38 14.5,43.9 1.1,44.3 7.2,44.7 6.7,48.9 24.8,48.9 0.9,49.2 31,50.7 9.1,53 11,53 12.9,53 8.1,54 10.1,54 11.9,54 13.9,54 1.4,54.2 9.1,55 11,55 12.9,55 28.2,55.5 30.4,55.5 8.1,56 10.1,56 11.9,56 13.9,56 9.1,56.8 11,56.8 12.9,56.8 18.2,57.4 8.1,57.8 10.1,57.8 11.9,57.8 13.9,57.8 9.1,58.8 11,58.8 12.9,58.8 31.5,59.5 5.7,59.8 8.1,59.8 10.1,59.8 11.9,59.8 13.9,59.8 36.7,60.5 40.1,60.5 45.6,60.5 49,60.7 41.6,61.6 11.4,64.7 48.6,64.9 17.4,65.1 26.4,65.1 42.8,65.1 34.8,65.2
LED1: LED1.A U1.1 | length 9.6
  Top Layer w0.4: U1.1 19.24,38 LED1.A
LED2: LED2.A U1.2 | length 14.2
  Top Layer w0.4: U1.2 21.7,33 LED2.A
LED3: LED3.A U1.3 | length 18.8
  Top Layer w0.4: U1.3 24.16,28 LED3.A
LED_PWM: R10.1 U1.4 | length 4.8
  Top Layer w0.4: U1.4 9,45.35 R10.1
NetLED1_K: LED1.K R9.2 | length 1.4
  Top Layer w0.4: R9.2 LED1.K
NetLED2_K: LED2.K R11.2 | length 1.4
  Top Layer w0.4: R11.2 LED2.K
NetLED3_K: LED3.K R12.2 | length 1.4
  Top Layer w0.4: R12.2 LED3.K
NetLED4_K: LED4.K R10.2 | length 45
  Top Layer w0.4: R10.2 10.75,45.45 11,45.7 11.05,45.7 28.05,62.7 44.4,62.7 v1(46.3,60.8)
  Bottom Layer w0.4: v1(46.3,60.8) 46.314,60.8 46.414,60.9 47.1,60.9 47.35,61.15 LED4.K
SENSE_1: U1.9 U5.3 | length 52.6
  Top Layer w0.4: U1.9 3.92,22.78 10.4,16.3 11.5,16.3 23.4,4.4 44.6,4.4 45.165,3.835 45.165,3.2 U5.3
SENSE_2: U1.10 U6.3 | length 51.4
  Top Layer w0.4: U1.10 6.46,22.84 23.1,6.2 29.9,6.2 30.9,5.2 45.2,5.2 v1(45.9,4.5)
  Bottom Layer w0.4: v1(45.9,4.5) 45.9,4.486 46.435,3.951 46.435,3.2 U6.3
SW_BAT+: Q1.D SW1.1
pads on no net: BAT1.MH1 BAT1.MH2 BAT1.MH3 C10.0 C11.0 C12.0 LED1.0 LED2.0 LED3.0 R9.0 R10.0 R11.0 R12.0 U1.5 U1.6 U1.7 U1.8 U1.11 U1.14

## Polygon pours and split planes (outlines as drawn)
BAT_VIN on Bottom Layer "BAT_VIN_L04_P013" (solid, pour order 13): 24.5,24.5 24.5,27.5 16.5,35.5 4.7,35.5 4.5,35.3 4.5,33.7 4.7,33.5 7,33.5 12.5,28 17,28 18,27 20.5,24.5
BAT+ on Bottom Layer "BAT+_L04_P009" (solid, remove dead copper, pour order 9): 27,11.5 28.5,10 28.5,8 27.5,7 17,7 15.5,5.5 8,5.5 7.5,6 7.5,13 8,13.5 16,13.5 18,11.5
SW_BAT+ on Bottom Layer "SW_BAT+_L04_P002" (solid, remove dead copper, pour order 2): 25.5,12 27.5,12 28.5,13 28.5,20.5 25,24 22.5,24 21.5,23 21.5,16
GND on GND1 "GND_L02_P000" (solid, pour order 0): 0,0 0,66 50,66 50,0
GND on GND2 "GND_L03_P001" (solid, pour order 1): 0,0 0,66 50,66 50,0

## Silkscreen, mask and mechanical layers (free items; w line width, h text height)
Top Overlay:
  circle w0.254: c6,29 r1
  circle w0.254: c6,37 r1
  lines w0.254: 5.5,37 6.5,37 ; 6,28.5 6,29.5 ; 6,36.5 6,37.5
  text ".Revision" at 4.4,11.4 h2
Bottom Overlay:
  circle w0.3: c5.5,57.5 r1.5
  circle w0.3: c5.5,8.5 r1.5
  lines w0.3: 4.7,8.5 6.3,8.5 ; 5.5,7.7 5.5,9.3 ; 5.5,56.7 5.5,58.3